# Altium PCB petroskey.PcbDoc (part 1 of 2)
Units mm, origin at the board's own origin, x right, y up, seen from the top; angles counter-clockwise.
Board outline 288 x 108 mm, 2 copper layers (Top Layer, Bottom Layer), stack 1.57 mm thick; 441 components, 333 nets, 1412 pads, 0 vias.
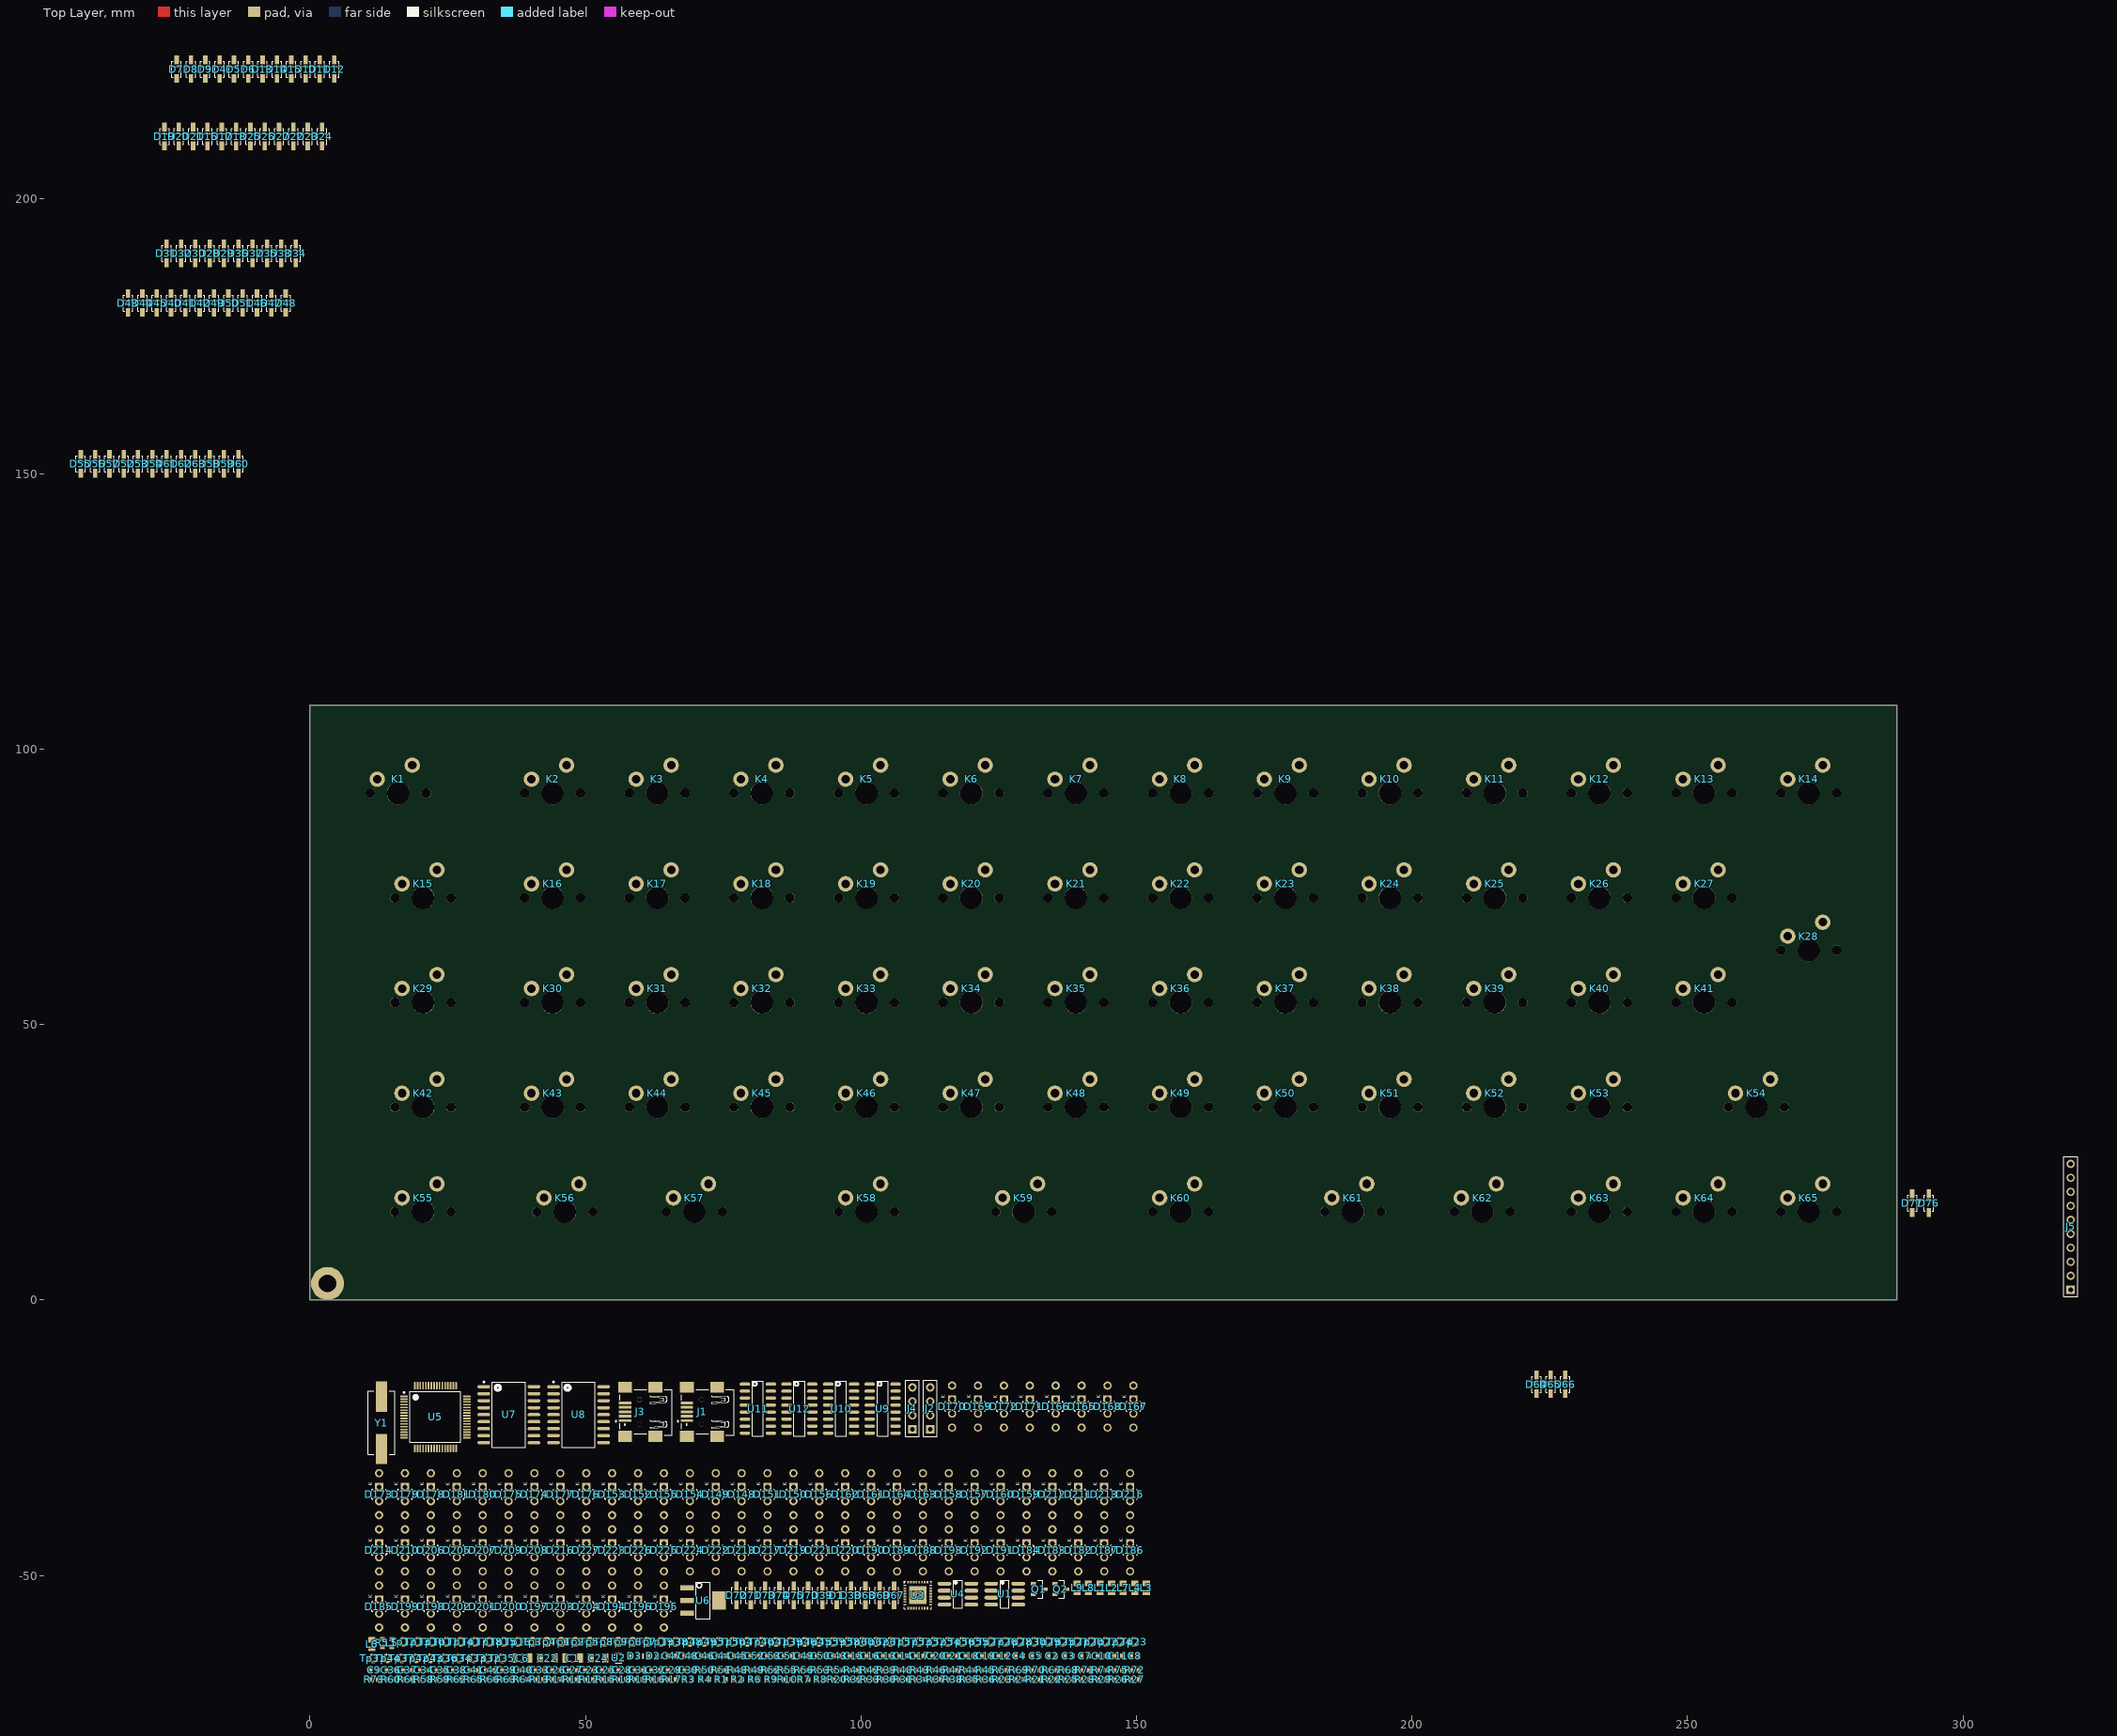
[diagram p0: Top Layer view]
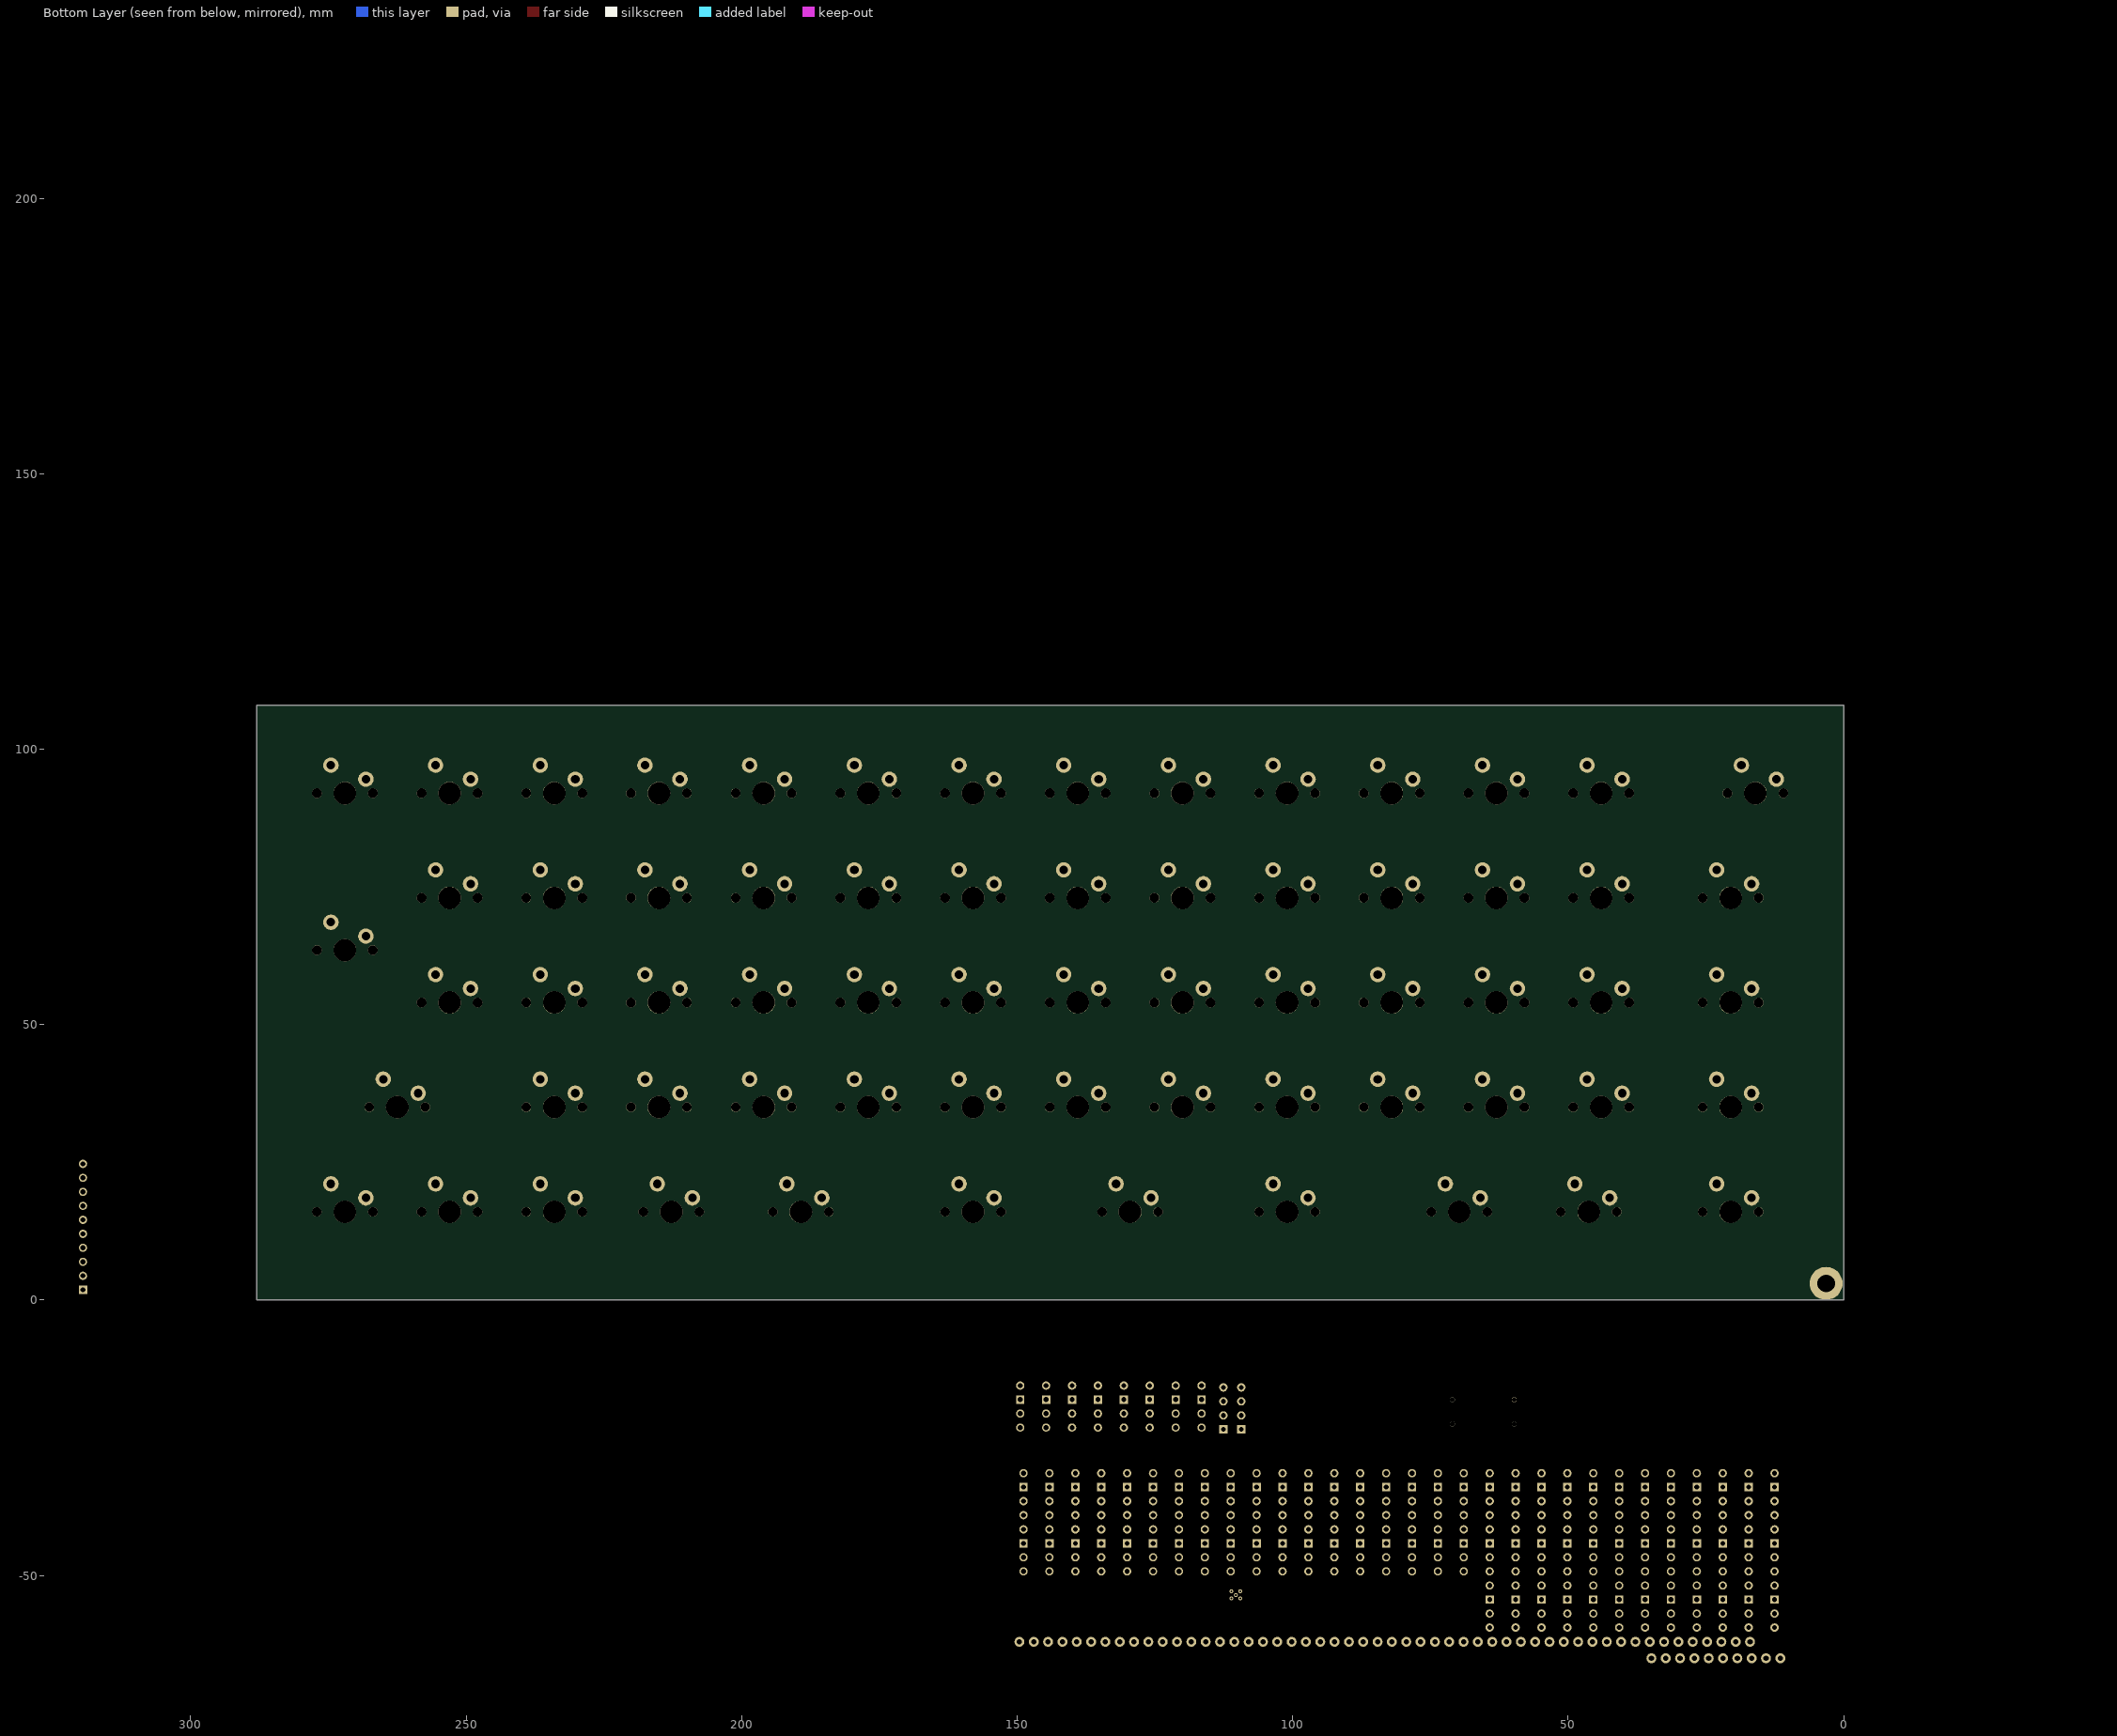
[diagram p1: Bottom Layer view, seen from below]

## Layer stack, top to bottom
Top Solder: solder mask 0.0102, Solder Resist, Dk 3.5
Top Layer: signal copper 0.035
Dielectric1: core 1.5, FR-4, Dk 4.2
Bottom Layer: signal copper 0.035
Bottom Solder: solder mask 0.0102, Solder Resist, Dk 3.5

## Board outline
0,0 0,108 288,108 288,0

## Design rules (kind name [scope] priority, off if disabled: settings)
Clearance [All] p1: gap=0.25
ComponentClearance [All] p1: gap=0.25 collisioncheckmode=3 verticalgap=0.25 showdistances=FALSE
DiffPairsRouting [All] p1: maxlimit=0.254 minlimit=0.254 mostfreqgap=0.254 toplayer_minwidth=0.381 toplayer_maxwidth=0.381 toplayer_prefwidth=0.381 bottomlayer_minwidth=0.381 bottomlayer_maxwidth=0.381 bottomlayer_prefwidth=0.381 maxuncoupledlength=12.7
HoleSize [All] p1: absolutevalues=TRUE maxlimit=10 minlimit=0.2 maxpercent=80.000 minpercent=20.000
HoleToHoleClearance [All] p1: gap=0.25 allowstackedmicrovias=TRUE
MinimumSolderMaskSliver [All] p1: minsoldermaskwidth=0.15
PlaneClearance [All] p1: clearance=0.5
PlaneConnect PlaneConnect_via [isvia] p1: planeconnectstyle=Direct reliefexpansion=0.508 reliefentries=4 reliefconductorwidth=0.254 reliefairgap=0.254
PlaneConnect [All] p2: planeconnectstyle=Relief reliefexpansion=0.6 reliefentries=4 reliefconductorwidth=0.35 reliefairgap=0.35
PolygonConnect PolygonConnect_via [isvia] p1: connectstyle=Direct reliefconductorwidth=0.254 reliefentries=4 polygonreliefangle="90 Angle" airgapwidth=0.254
PolygonConnect [All] p2: connectstyle=Relief reliefconductorwidth=0.35 reliefentries=4 polygonreliefangle="90 Angle" airgapwidth=0.6
RoutingCorners [All] p1: cornerstyle=45-Degree minsetback=2.5 maxsetback=2.5
RoutingVias [All] p1: holewidth=0.3 width=0.6 viastyle="Through Hole" minholewidth=0.2 minwidth=0.35 maxholewidth=0.5 maxwidth=1
SilkToSilkClearance [All] p1: silktosilkclearance=0.1
SilkToSolderMaskClearance [IsPad] p1: minsilkscreentomaskgap=0.15 clearancetoexposedcopper=TRUE
SolderMaskExpansion SolderMaskExpansion_via [isVia] p1: expansion=-10
SolderMaskExpansion [All] p2: expansion=0.05
Width [All] p1: maxlimit=5 minlimit=0.15 preferedwidth=0.25
20 further rules are at their usual default settings.

## Classes and differential pairs
net class usb_diff: USB_N USB_P
net class Power: +3.3V +5V VDD
differential pair USB: +USB_P -USB_N
differential pair FTDIUSB: +FTDIUSB_P -FTDIUSB_N

## Components (designator, comment, footprint, x,y, rotation, side; value= is the part's Value field where it differs from the comment)
C1 "4.7uF" 1206_[3216] 47.675,-65.004 r0 top
C2 "100nF" 0603_[1608] 134.679,-64.604 r0 top
C3 "10nF" 0603_[1608] 137.679,-64.604 r0 top
C4 "100nF" 0603_[1608] 128.678,-64.604 r0 top
C5 "100nF" 0603_[1608] 131.678,-64.604 r0 top
C6 "4.7uF" 1206_[3216] 38.475,-65.004 r0 top
C7 "10nF" 0603_[1608] 140.679,-64.604 r0 top
C8 "100nF" 0603_[1608] 149.679,-64.604 r0 top
C9 "100nF" 0603_[1608] 11.675,-67.204 r0 top
C10 "100nF" 0603_[1608] 143.679,-64.604 r0 top
C11 "27pF" 0603_[1608] 146.679,-64.604 r0 top
C12 "100nF" 0603_[1608] 125.678,-64.604 r0 top
C13 "27pF" 0603_[1608] 104.677,-64.604 r0 top
C14 "1uF" 0603_[1608] 107.677,-64.604 r0 top
C15 "2.2uF" 0603_[1608] 98.677,-64.604 r0 top
C16 "2.2uF" 0603_[1608] 101.677,-64.604 r0 top
C17 "100nF" 0603_[1608] 110.677,-64.604 r0 top
C18 "100nF" 0603_[1608] 119.678,-64.604 r0 top
C19 "100nF" 0603_[1608] 122.678,-64.604 r0 top
C20 "100nF" 0603_[1608] 113.678,-64.604 r0 top
C21 "4.7uF" 0603_[1608] 116.678,-64.604 r0 top
C22 "10uF" 1206_[3216] 43.075,-65.004 r0 top
C23 "100nF" 0603_[1608] 50.677,-67.204 r0 top
C24 "10uF" 1206_[3216] 52.275,-65.004 r0 top
C25 "100nF" 0603_[1608] 53.677,-67.204 r0 top
C26 "100nF" 0603_[1608] 44.677,-67.204 r0 top
C27 "100nF" 0603_[1608] 47.677,-67.204 r0 top
C28 "100nF" 0603_[1608] 56.677,-67.204 r0 top
C29 "100nF" 0603_[1608] 65.678,-67.204 r0 top
C30 "100nF" 0603_[1608] 68.678,-67.204 r0 top
C31 "100nF" 0603_[1608] 59.678,-67.204 r0 top
C32 "100nF" 0603_[1608] 62.678,-67.204 r0 top
C33 "100nF" 0603_[1608] 41.677,-67.204 r0 top
C34 "100nF" 0603_[1608] 20.675,-67.204 r0 top
C35 "100nF" 0603_[1608] 23.676,-67.204 r0 top
C36 "100nF" 0603_[1608] 14.675,-67.204 r0 top
C37 "100nF" 0603_[1608] 17.675,-67.204 r0 top
C38 "100nF" 0603_[1608] 26.676,-67.204 r0 top
C39 "100nF" 0603_[1608] 35.676,-67.204 r0 top
C40 "100nF" 0603_[1608] 38.676,-67.204 r0 top
C41 "100nF" 0603_[1608] 29.676,-67.204 r0 top
C42 "100nF" 0603_[1608] 32.676,-67.204 r0 top
C43 "100nF" 0603_[1608] 95.677,-64.604 r0 top
C44 "100nF" 0603_[1608] 74.675,-64.604 r0 top
C45 "100nF" 0603_[1608] 77.676,-64.604 r0 top
C46 "100nF" 0603_[1608] 71.675,-64.604 r0 top
C47 "100nF" 0603_[1608] 65.675,-64.604 r0 top
C48 "100nF" 0603_[1608] 68.675,-64.604 r0 top
C49 "100nF" 0603_[1608] 89.676,-64.604 r0 top
C50 "100nF" 0603_[1608] 92.676,-64.604 r0 top
C51 "100nF" 0603_[1608] 86.676,-64.604 r0 top
C52 "100nF" 0603_[1608] 80.676,-64.604 r0 top
C53 "100nF" 0603_[1608] 83.676,-64.604 r0 top
D1 "MBR120VLSFT1G" SOD-123 95.575,-53.604 r90 top
D2 "+5V" 0603_[1608]_K2-A1_LED 62.275,-64.654 r0 top
D3 "+3.3V" 0603_[1608]_K2-A1_LED 58.875,-64.654 r0 top
D4 "diode" SOD-123 -16.425,223.446 r90 top
D5 "diode" SOD-123 -13.825,223.446 r90 top
D6 "diode" SOD-123 -11.225,223.446 r90 top
D7 "diode" SOD-123 -24.225,223.446 r90 top
D8 "diode" SOD-123 -21.625,223.446 r90 top
D9 "diode" SOD-123 -19.025,223.446 r90 top
D10 "diode" SOD-123 -0.825,223.446 r90 top
D11 "diode" SOD-123 1.775,223.446 r90 top
D12 "diode" SOD-123 4.375,223.446 r90 top
D13 "diode" SOD-123 -8.625,223.446 r90 top
D14 "diode" SOD-123 -6.025,223.446 r90 top
D15 "diode" SOD-123 -3.425,223.446 r90 top
D16 "diode" SOD-123 -18.625,211.25 r90 top
D17 "diode" SOD-123 -16.025,211.25 r90 top
D18 "diode" SOD-123 -13.425,211.25 r90 top
D19 "diode" SOD-123 -26.425,211.25 r90 top
D20 "diode" SOD-123 -23.825,211.25 r90 top
D21 "diode" SOD-123 -21.225,211.25 r90 top
D22 "diode" SOD-123 -3.025,211.25 r90 top
D23 "diode" SOD-123 -0.425,211.25 r90 top
D24 "diode" SOD-123 2.175,211.25 r90 top
D25 "diode" SOD-123 -10.825,211.25 r90 top
D26 "diode" SOD-123 -8.225,211.25 r90 top
D27 "diode" SOD-123 -5.625,211.25 r90 top
D28 "diode" SOD-123 -18.225,190 r90 top
D29 "diode" SOD-123 -15.625,190 r90 top
D30 "diode" SOD-123 -20.825,190 r90 top
D31 "diode" SOD-123 -26.025,190 r90 top
D32 "diode" SOD-123 -23.425,190 r90 top
D33 "diode" SOD-123 -5.225,190 r90 top
D34 "diode" SOD-123 -2.625,190 r90 top
D35 "diode" SOD-123 -7.825,190 r90 top
D36 "diode" SOD-123 -13.025,190 r90 top
D37 "diode" SOD-123 -10.425,190 r90 top
D38 "diode" SOD-123 98.175,-53.604 r90 top
D39 "diode" SOD-123 92.975,-53.604 r90 top
D40 "diode" SOD-123 -25.225,180.996 r90 top
D41 "diode" SOD-123 -22.625,180.996 r90 top
D42 "diode" SOD-123 -20.025,180.996 r90 top
D43 "diode" SOD-123 -33.025,180.996 r90 top
D44 "diode" SOD-123 -30.425,180.996 r90 top
D45 "diode" SOD-123 -27.825,180.996 r90 top
D46 "diode" SOD-123 -9.625,180.996 r90 top
D47 "diode" SOD-123 -7.025,180.996 r90 top
D48 "diode" SOD-123 -4.425,180.996 r90 top
D49 "diode" SOD-123 -17.425,180.996 r90 top
D50 "diode" SOD-123 -14.825,180.996 r90 top
D51 "diode" SOD-123 -12.225,180.996 r90 top
D52 "diode" SOD-123 -33.825,151.8 r90 top
D53 "diode" SOD-123 -31.225,151.8 r90 top
D54 "diode" SOD-123 -28.625,151.8 r90 top
D55 "diode" SOD-123 -41.625,151.8 r90 top
D56 "diode" SOD-123 -39.025,151.8 r90 top
D57 "diode" SOD-123 -36.425,151.8 r90 top
D58 "diode" SOD-123 -18.225,151.8 r90 top
D59 "diode" SOD-123 -15.625,151.8 r90 top
D60 "diode" SOD-123 -13.025,151.8 r90 top
D61 "diode" SOD-123 -26.025,151.8 r90 top
D62 "diode" SOD-123 -23.425,151.8 r90 top
D63 "diode" SOD-123 -20.825,151.8 r90 top
D64 "diode" SOD-123 222.575,-15.304 r90 top
D65 "diode" SOD-123 225.175,-15.304 r90 top
D66 "diode" SOD-123 227.775,-15.304 r90 top
D67 "diode" SOD-123 105.975,-53.604 r90 top
D68 "diode" SOD-123 100.775,-53.604 r90 top
D69 "diode" SOD-123 103.375,-53.604 r90 top
D70 "diode" SOD-123 90.375,-53.604 r90 top
D71 "diode" SOD-123 79.975,-53.604 r90 top
D72 "diode" SOD-123 77.375,-53.604 r90 top
D73 "diode" SOD-123 82.575,-53.604 r90 top
D74 "diode" SOD-123 85.175,-53.604 r90 top
D75 "diode" SOD-123 87.775,-53.604 r90 top
D76 "diode" SOD-123 293.775,17.6 r90 top
D77 "diode" SOD-123 290.775,17.6 r90 top
D148 "RBG" R3_RGB_LED_THD 78.325,-35.254 r90 top
D149 "RBG" R3_RGB_LED_THD 73.625,-35.254 r90 top
D150 "RBG" R3_RGB_LED_THD 87.725,-35.254 r90 top
D151 "RBG" R3_RGB_LED_THD 83.025,-35.254 r90 top
D152 "RBG" R3_RGB_LED_THD 59.525,-35.254 r90 top
D153 "RBG" R3_RGB_LED_THD 54.825,-35.254 r90 top
D154 "RBG" R3_RGB_LED_THD 68.925,-35.254 r90 top
D155 "RBG" R3_RGB_LED_THD 64.225,-35.254 r90 top
D156 "RBG" R3_RGB_LED_THD 92.425,-35.254 r90 top
D157 "RBG" R3_RGB_LED_THD 120.625,-35.254 r90 top
D158 "RBG" R3_RGB_LED_THD 115.925,-35.254 r90 top
D159 "RBG" R3_RGB_LED_THD 130.025,-35.254 r90 top
D160 "RBG" R3_RGB_LED_THD 125.325,-35.254 r90 top
D161 "RBG" R3_RGB_LED_THD 101.825,-35.254 r90 top
D162 "RBG" R3_RGB_LED_THD 97.125,-35.254 r90 top
D163 "RBG" R3_RGB_LED_THD 111.225,-35.254 r90 top
D164 "RBG" R3_RGB_LED_THD 106.525,-35.254 r90 top
D165 "RBG" R3_RGB_LED_THD 140.025,-19.354 r90 top
D166 "RBG" R3_RGB_LED_THD 135.325,-19.354 r90 top
D167 "RBG" R3_RGB_LED_THD 149.425,-19.354 r90 top
D168 "RBG" R3_RGB_LED_THD 144.725,-19.354 r90 top
D169 "RBG" R3_RGB_LED_THD 121.225,-19.354 r90 top
D170 "RBG" R3_RGB_LED_THD 116.525,-19.354 r90 top
D171 "RBG" R3_RGB_LED_THD 130.625,-19.354 r90 top
D172 "RBG" R3_RGB_LED_THD 125.925,-19.354 r90 top
D173 "RBG" R3_RGB_LED_THD 12.525,-35.254 r90 top
D174 "RBG" R3_RGB_LED_THD 40.725,-35.254 r90 top
D175 "RBG" R3_RGB_LED_THD 36.025,-35.254 r90 top
D176 "RBG" R3_RGB_LED_THD 50.125,-35.254 r90 top
D177 "RBG" R3_RGB_LED_THD 45.425,-35.254 r90 top
D178 "RBG" R3_RGB_LED_THD 21.925,-35.254 r90 top
D179 "RBG" R3_RGB_LED_THD 17.225,-35.254 r90 top
D180 "RBG" R3_RGB_LED_THD 31.325,-35.254 r90 top
D181 "RBG" R3_RGB_LED_THD 26.625,-35.254 r90 top
D182 "RBG" R3_RGB_LED_THD 139.425,-45.454 r90 top
D183 "RBG" R3_RGB_LED_THD 134.725,-45.454 r90 top
D184 "RBG" R3_RGB_LED_THD 130.025,-45.454 r90 top
D185 "RBG" R3_RGB_LED_THD 12.525,-55.654 r90 top
D186 "RBG" R3_RGB_LED_THD 148.825,-45.454 r90 top
D187 "RBG" R3_RGB_LED_THD 144.125,-45.454 r90 top
D188 "RBG" R3_RGB_LED_THD 111.225,-45.454 r90 top
D189 "RBG" R3_RGB_LED_THD 106.525,-45.454 r90 top
D190 "RBG" R3_RGB_LED_THD 101.825,-45.454 r90 top
D191 "RBG" R3_RGB_LED_THD 125.325,-45.454 r90 top
D192 "RBG" R3_RGB_LED_THD 120.625,-45.454 r90 top
D193 "RBG" R3_RGB_LED_THD 115.925,-45.454 r90 top
D194 "RBG" R3_RGB_LED_THD 54.825,-55.654 r90 top
D195 "RBG" R3_RGB_LED_THD 64.225,-55.654 r90 top
D196 "RBG" R3_RGB_LED_THD 59.525,-55.654 r90 top
D197 "RBG" R3_RGB_LED_THD 40.725,-55.654 r90 top
D198 "RBG" R3_RGB_LED_THD 21.925,-55.654 r90 top
D199 "RBG" R3_RGB_LED_THD 17.225,-55.654 r90 top
D200 "RBG" R3_RGB_LED_THD 36.025,-55.654 r90 top
D201 "RBG" R3_RGB_LED_THD 31.325,-55.654 r90 top
D202 "RBG" R3_RGB_LED_THD 26.625,-55.654 r90 top
D203 "RBG" R3_RGB_LED_THD 45.425,-55.654 r90 top
D204 "RBG" R3_RGB_LED_THD 50.125,-55.654 r90 top
D205 "RBG" R3_RGB_LED_THD 26.625,-45.454 r90 top
D206 "RBG" R3_RGB_LED_THD 21.925,-45.454 r90 top
D207 "RBG" R3_RGB_LED_THD 31.325,-45.454 r90 top
D208 "RBG" R3_RGB_LED_THD 40.725,-45.454 r90 top
D209 "RBG" R3_RGB_LED_THD 36.025,-45.454 r90 top
D210 "RBG" R3_RGB_LED_THD 17.225,-45.454 r90 top
D211 "RBG" R3_RGB_LED_THD 139.425,-35.254 r90 top
D212 "RBG" R3_RGB_LED_THD 134.725,-35.254 r90 top
D213 "RBG" R3_RGB_LED_THD 144.125,-35.254 r90 top
D214 "RBG" R3_RGB_LED_THD 12.525,-45.454 r90 top
D215 "RBG" R3_RGB_LED_THD 148.825,-35.254 r90 top
D216 "RBG" R3_RGB_LED_THD 45.425,-45.454 r90 top
D217 "RBG" R3_RGB_LED_THD 83.025,-45.454 r90 top
D218 "RBG" R3_RGB_LED_THD 78.325,-45.454 r90 top
D219 "RBG" R3_RGB_LED_THD 87.725,-45.454 r90 top
D220 "RBG" R3_RGB_LED_THD 97.125,-45.454 r90 top
D221 "RBG" R3_RGB_LED_THD 92.425,-45.454 r90 top
D222 "RBG" R3_RGB_LED_THD 73.625,-45.454 r90 top
D223 "RBG" R3_RGB_LED_THD 54.825,-45.454 r90 top
D224 "RBG" R3_RGB_LED_THD 68.925,-45.454 r90 top
D225 "RBG" R3_RGB_LED_THD 64.225,-45.454 r90 top
D226 "RBG" R3_RGB_LED_THD 59.525,-45.454 r90 top
D227 "RBG" R3_RGB_LED_THD 50.125,-45.454 r90 top
J1 "Mini USB Type B" usb_typeB_mini_smd 71.145,-20.304 r90 top
J2 "SWD" HEADER_1X4_2.54MM_THD 112.555,-19.684 r90 top
J3 "Mini USB Type B" usb_typeB_mini_smd 59.925,-20.304 r90 top
J4 "PCB Conn" HEADER_1X4_2.54MM_THD 109.315,-19.684 r90 top
J5 "Display" HDR1X10 319.524,1.849 r90 top
K1 "KEY0" TACTILE_SWITCH_GATERON_PCB 16,92 r0 top locked
K2 "KEY0" TACTILE_SWITCH_GATERON_PCB 44,92 r0 top locked
K3 "KEY0" TACTILE_SWITCH_GATERON_PCB 63,92 r0 top locked
K4 "KEY0" TACTILE_SWITCH_GATERON_PCB 82,92 r0 top locked
K5 "KEY0" TACTILE_SWITCH_GATERON_PCB 101,92 r0 top locked
K6 "KEY0" TACTILE_SWITCH_GATERON_PCB 120,92 r0 top locked
K7 "KEY0" TACTILE_SWITCH_GATERON_PCB 139,92 r0 top locked
K8 "KEY0" TACTILE_SWITCH_GATERON_PCB 158,92 r0 top locked
K9 "KEY0" TACTILE_SWITCH_GATERON_PCB 177,92 r0 top locked
K10 "KEY0" TACTILE_SWITCH_GATERON_PCB 196,92 r0 top locked
K11 "KEY0" TACTILE_SWITCH_GATERON_PCB 215,92 r0 top locked
K12 "KEY0" TACTILE_SWITCH_GATERON_PCB 234,92 r0 top locked
K13 "KEY0" TACTILE_SWITCH_GATERON_PCB 253,92 r0 top locked
K14 "KEY0" TACTILE_SWITCH_GATERON_PCB 272,92 r0 top locked
K15 "KEY0" TACTILE_SWITCH_GATERON_PCB 20.5,73 r0 top locked
K16 "KEY0" TACTILE_SWITCH_GATERON_PCB 44,73 r0 top locked
K17 "KEY0" TACTILE_SWITCH_GATERON_PCB 63,73 r0 top locked
K18 "KEY0" TACTILE_SWITCH_GATERON_PCB 82,73 r0 top locked
K19 "KEY0" TACTILE_SWITCH_GATERON_PCB 101,73 r0 top locked
K20 "KEY0" TACTILE_SWITCH_GATERON_PCB 120,73 r0 top locked
K21 "KEY0" TACTILE_SWITCH_GATERON_PCB 139,73 r0 top locked
K22 "KEY0" TACTILE_SWITCH_GATERON_PCB 158,73 r0 top locked
K23 "KEY0" TACTILE_SWITCH_GATERON_PCB 177,73 r0 top locked
K24 "KEY0" TACTILE_SWITCH_GATERON_PCB 196,73 r0 top locked
K25 "KEY0" TACTILE_SWITCH_GATERON_PCB 215,73 r0 top locked
K26 "KEY0" TACTILE_SWITCH_GATERON_PCB 234,73 r0 top locked
K27 "KEY0" TACTILE_SWITCH_GATERON_PCB 253,73 r0 top locked
K28 "KEY0" TACTILE_SWITCH_GATERON_PCB 272,63.5 r0 top locked
K29 "KEY0" TACTILE_SWITCH_GATERON_PCB 20.5,54 r0 top locked
K30 "KEY0" TACTILE_SWITCH_GATERON_PCB 44,54 r0 top locked
K31 "KEY0" TACTILE_SWITCH_GATERON_PCB 63,54 r0 top locked
K32 "KEY0" TACTILE_SWITCH_GATERON_PCB 82,54 r0 top locked
K33 "KEY0" TACTILE_SWITCH_GATERON_PCB 101,54 r0 top locked
K34 "KEY0" TACTILE_SWITCH_GATERON_PCB 120,54 r0 top locked
K35 "KEY0" TACTILE_SWITCH_GATERON_PCB 139,54 r0 top locked
K36 "KEY0" TACTILE_SWITCH_GATERON_PCB 158,54 r0 top locked
K37 "KEY0" TACTILE_SWITCH_GATERON_PCB 177,54 r0 top locked
K38 "KEY0" TACTILE_SWITCH_GATERON_PCB 196,54 r0 top locked
K39 "KEY0" TACTILE_SWITCH_GATERON_PCB 215,54 r0 top locked
K40 "KEY0" TACTILE_SWITCH_GATERON_PCB 234,54 r0 top locked
K41 "KEY0" TACTILE_SWITCH_GATERON_PCB 253,54 r0 top locked
K42 "KEY0" TACTILE_SWITCH_GATERON_PCB 20.5,35 r0 top locked
K43 "KEY0" TACTILE_SWITCH_GATERON_PCB 44,35 r0 top locked
K44 "KEY0" TACTILE_SWITCH_GATERON_PCB 63,35 r0 top locked
K45 "KEY0" TACTILE_SWITCH_GATERON_PCB 82,35 r0 top locked
K46 "KEY0" TACTILE_SWITCH_GATERON_PCB 101,35 r0 top locked
K47 "KEY0" TACTILE_SWITCH_GATERON_PCB 120,35 r0 top locked
K48 "KEY0" TACTILE_SWITCH_GATERON_PCB 139,35 r0 top locked
K49 "KEY0" TACTILE_SWITCH_GATERON_PCB 158,35 r0 top locked
K50 "KEY0" TACTILE_SWITCH_GATERON_PCB 177,35 r0 top locked
K51 "KEY0" TACTILE_SWITCH_GATERON_PCB 196,35 r0 top locked
K52 "KEY0" TACTILE_SWITCH_GATERON_PCB 215,35 r0 top locked
K53 "KEY0" TACTILE_SWITCH_GATERON_PCB 234,35 r0 top locked
K54 "KEY0" TACTILE_SWITCH_GATERON_PCB 262.5,35 r0 top locked
K55 "KEY0" TACTILE_SWITCH_GATERON_PCB 20.5,16 r0 top locked
K56 "KEY0" TACTILE_SWITCH_GATERON_PCB 46.25,16 r0 top locked
K57 "KEY0" TACTILE_SWITCH_GATERON_PCB 69.75,16 r0 top locked
K58 "KEY0" TACTILE_SWITCH_GATERON_PCB 101,16 r0 top locked
K59 "KEY0" TACTILE_SWITCH_GATERON_PCB 129.5,16 r0 top locked
K60 "KEY0" TACTILE_SWITCH_GATERON_PCB 158,16 r0 top locked
K61 "KEY0" TACTILE_SWITCH_GATERON_PCB 189.25,16 r0 top locked
K62 "KEY0" TACTILE_SWITCH_GATERON_PCB 212.75,16 r0 top locked
K63 "KEY0" TACTILE_SWITCH_GATERON_PCB 234,16 r0 top locked
K64 "KEY0" tactile_switch_gateron_pcb 253,16 r0 top locked
K65 "KEY0" tactile_switch_gateron_pcb 272,16 r0 top locked
L1 "220 ohm @ 100MHz" 0805_[2012] 143.375,-52.254 r90 top
L2 "220 ohm @ 100MHz" 0805_[2012] 145.475,-52.254 r90 top
L3 "220 ohm @ 100MHz" 0805_[2012] 151.775,-52.254 r90 top
L4 "220 ohm @ 100MHz" 0805_[2012] 149.675,-52.254 r90 top
L5 "180R @ 100Mhz" 0603_[1608] 14.825,-62.254 r90 top
L6 "220 ohm @ 100MHz" 0805_[2012] 11.225,-62.454 r90 top
L7 "220 ohm @ 100MHz" 0805_[2012] 147.575,-52.254 r90 top
L8 "220 ohm @ 100MHz" 0805_[2012] 141.275,-52.254 r90 top
L9 "220 ohm @ 100MHz" 0805_[2012] 139.175,-52.254 r90 top
Q1 "BC817" SOT-23 132.312,-52.504 r0 top
Q2 "BC817" SOT-23 136.212,-52.504 r0 top
R1 "10k" 0603_[1608] 74.678,-68.904 r0 top
R2 "47k" 0603_[1608] 77.678,-68.904 r0 top
R3 "10k" 0603_[1608] 68.678,-68.904 r0 top
R4 "10k" 0603_[1608] 71.678,-68.904 r0 top
R5 "1k" 0603_[1608] 13.125,-62.254 r90 top
R6 "33k" 0603_[1608] 80.679,-68.904 r0 top
R7 "1k5" 0603_[1608] 89.679,-68.904 r0 top
R8 "100K" 0603_[1608] 92.679,-68.904 r0 top
R9 "33R" 0603_[1608] 83.679,-68.904 r0 top
R10 "33R" 0603_[1608] 86.679,-68.904 r0 top
R11 "33R" 0603_[1608] 47.677,-68.904 r0 top
R12 "33R" 0603_[1608] 50.677,-68.904 r0 top
R13 "33R" 0603_[1608] 41.677,-68.904 r0 top
R14 "33R" 0603_[1608] 44.677,-68.904 r0 top
R15 "33R" 0603_[1608] 53.677,-68.904 r0 top
R16 "33R" 0603_[1608] 62.678,-68.904 r0 top
R17 "33R" 0603_[1608] 65.678,-68.904 r0 top
R18 "33R" 0603_[1608] 56.677,-68.904 r0 top
R19 "33R" 0603_[1608] 59.678,-68.904 r0 top
R20 "33R" 0603_[1608] 95.679,-68.904 r0 top
R21 "33R" 0603_[1608] 131.681,-68.904 r0 top
R22 "1M" 0603_[1608] 134.682,-68.904 r0 top
R23 "10K" 0603_[1608] 125.681,-68.904 r0 top
R24 "10K" 0603_[1608] 128.681,-68.904 r0 top
R25 "33R" 0603_[1608] 137.682,-68.904 r0 top
R26 "10K" 0603_[1608] 146.682,-68.904 r0 top
R27 "33R" 0603_[1608] 149.682,-68.904 r0 top
R28 "10K" 0603_[1608] 140.682,-68.904 r0 top
R29 "10K" 0603_[1608] 143.682,-68.904 r0 top
R30 "33R" 0603_[1608] 104.68,-68.904 r0 top
R31 "33R" 0603_[1608] 107.68,-68.904 r0 top
R32 "33R" 0603_[1608] 98.68,-68.904 r0 top
R33 "33R" 0603_[1608] 101.68,-68.904 r0 top
R34 "680R" 0603_[1608] 110.68,-68.904 r0 top
R35 "180R" 0603_[1608] 119.681,-68.904 r0 top
R36 "33R" 0603_[1608] 122.681,-68.904 r0 top
R37 "33R" 0603_[1608] 113.68,-68.904 r0 top
R38 "33R" 0603_[1608] 116.681,-68.904 r0 top
R39 "33R" 0603_[1608] 104.68,-67.204 r0 top
R40 "33R" 0603_[1608] 107.68,-67.204 r0 top
R41 "33R" 0603_[1608] 98.68,-67.204 r0 top
R42 "33R" 0603_[1608] 101.68,-67.204 r0 top
R43 "33R" 0603_[1608] 110.68,-67.204 r0 top
R44 "33R" 0603_[1608] 119.681,-67.204 r0 top
R45 "33R" 0603_[1608] 122.681,-67.204 r0 top
R46 "33R" 0603_[1608] 113.68,-67.204 r0 top
R47 "33R" 0603_[1608] 116.681,-67.204 r0 top
R48 "33R" 0603_[1608] 77.678,-67.204 r0 top
R49 "33R" 0603_[1608] 80.679,-67.204 r0 top
R50 "33R" 0603_[1608] 71.678,-67.204 r0 top
R51 "33R" 0603_[1608] 74.678,-67.204 r0 top
R52 "33R" 0603_[1608] 83.679,-67.204 r0 top
R53 "33R" 0603_[1608] 92.679,-67.204 r0 top
R54 "33R" 0603_[1608] 95.679,-67.204 r0 top
R55 "33R" 0603_[1608] 86.679,-67.204 r0 top
R56 "33R" 0603_[1608] 89.679,-67.204 r0 top
R57 "33R" 0603_[1608] 125.681,-67.204 r0 top
R58 "33R" 0603_[1608] 20.675,-68.904 r0 top
R59 "33R" 0603_[1608] 23.676,-68.904 r0 top
R60 "33R" 0603_[1608] 14.675,-68.904 r0 top
R61 "33R" 0603_[1608] 17.675,-68.904 r0 top
R62 "33R" 0603_[1608] 26.676,-68.904 r0 top
R63 "33R" 0603_[1608] 35.676,-68.904 r0 top
R64 "33R" 0603_[1608] 38.676,-68.904 r0 top
R65 "33R" 0603_[1608] 29.676,-68.904 r0 top
R66 "33R" 0603_[1608] 32.676,-68.904 r0 top
R67 "33R" 0603_[1608] 134.682,-67.204 r0 top
R68 "33R" 0603_[1608] 137.682,-67.204 r0 top
R69 "33R" 0603_[1608] 128.681,-67.204 r0 top
R70 "33R" 0603_[1608] 131.681,-67.204 r0 top
R71 "33R" 0603_[1608] 140.682,-67.204 r0 top
R72 "33R" 0603_[1608] 149.682,-67.204 r0 top
R73 "33R" 0603_[1608] 11.675,-68.904 r0 top
R74 "33R" 0603_[1608] 143.682,-67.204 r0 top
R75 "2K2" 0603_[1608] 146.682,-67.204 r0 top
Tp1 "PA2-C0" TEST_POINT_THD_D1.8MM 45.575,-62.054 r0 top
Tp2 "PA3-R0" TEST_POINT_THD_D1.8MM 48.175,-62.054 r0 top
Tp3 "+3.3V" TEST_POINT_THD_D1.8MM 40.375,-62.054 r0 top
Tp4 "+5V" TEST_POINT_THD_D1.8MM 42.975,-62.054 r0 top
Tp5 "GND" TEST_POINT_THD_D1.8MM 50.775,-62.054 r0 top
Tp6 "GND" TEST_POINT_THD_D1.8MM 58.575,-62.054 r0 top
Tp7 "Vusb" TEST_POINT_THD_D1.8MM 61.175,-62.054 r0 top
Tp8 "PB0" TEST_POINT_THD_D1.8MM 53.375,-62.054 r0 top
Tp9 "PB0" TEST_POINT_THD_D1.8MM 55.975,-62.054 r0 top
Tp10 "PB0" TEST_POINT_THD_D1.8MM 22.175,-62.054 r0 top
Tp11 "PB0" TEST_POINT_THD_D1.8MM 24.775,-62.054 r0 top
Tp12 "PB0" TEST_POINT_THD_D1.8MM 16.975,-62.054 r0 top
Tp13 "PB0" TEST_POINT_THD_D1.8MM 19.575,-62.054 r0 top
Tp14 "PB0" TEST_POINT_THD_D1.8MM 27.375,-62.054 r0 top
Tp15 "PB0" TEST_POINT_THD_D1.8MM 35.175,-62.054 r0 top
Tp16 "PB0" TEST_POINT_THD_D1.8MM 37.775,-62.054 r0 top
Tp17 "PB0" TEST_POINT_THD_D1.8MM 29.975,-62.054 r0 top
Tp18 "PB0" TEST_POINT_THD_D1.8MM 32.575,-62.054 r0 top
Tp19 "PB0" TEST_POINT_THD_D1.8MM 63.775,-62.054 r0 top
Tp20 "PB0" TEST_POINT_THD_D1.8MM 141.775,-62.054 r0 top
Tp21 "PB0" TEST_POINT_THD_D1.8MM 139.175,-62.054 r0 top
Tp22 "PB0" TEST_POINT_THD_D1.8MM 144.375,-62.054 r0 top
Tp23 "PB0" TEST_POINT_THD_D1.8MM 149.575,-62.054 r0 top
Tp24 "PB0" TEST_POINT_THD_D1.8MM 146.975,-62.054 r0 top
Tp25 "PB0" TEST_POINT_THD_D1.8MM 136.575,-62.054 r0 top
Tp26 "PB0" TEST_POINT_THD_D1.8MM 126.175,-62.054 r0 top
Tp27 "PB0" TEST_POINT_THD_D1.8MM 123.575,-62.054 r0 top
Tp28 "PB0" TEST_POINT_THD_D1.8MM 128.775,-62.054 r0 top
Tp29 "PB0" TEST_POINT_THD_D1.8MM 133.975,-62.054 r0 top
Tp30 "PB0" TEST_POINT_THD_D1.8MM 131.375,-62.054 r0 top
Tp31 "PB0" TEST_POINT_THD_D1.8MM 11.475,-65.054 r0 top
Tp32 "PA3-R0" TEST_POINT_THD_D1.8MM 32.275,-65.054 r0 top
Tp33 "PA3-R0" TEST_POINT_THD_D1.8MM 29.675,-65.054 r0 top
Tp34 "PA3-R0" TEST_POINT_THD_D1.8MM 27.075,-65.054 r0 top
Tp35 "PA3-R0" TEST_POINT_THD_D1.8MM 34.875,-65.054 r0 top
Tp36 "PA3-R0" TEST_POINT_THD_D1.8MM 24.475,-65.054 r0 top
Tp37 "PA3-R0" TEST_POINT_THD_D1.8MM 16.675,-65.054 r0 top
Tp38 "PA3-R0" TEST_POINT_THD_D1.8MM 66.375,-62.054 r0 top
Tp39 "PA3-R0" TEST_POINT_THD_D1.8MM 87.175,-62.054 r0 top
Tp40 "PA3-R0" TEST_POINT_THD_D1.8MM 81.975,-62.054 r0 top
Tp41 "PA3-R0" TEST_POINT_THD_D1.8MM 84.575,-62.054 r0 top
Tp42 "PA3-R0" TEST_POINT_THD_D1.8MM 19.275,-65.054 r0 top
Tp43 "PA3-R0" TEST_POINT_THD_D1.8MM 21.875,-65.054 r0 top
Tp44 "PA3-R0" TEST_POINT_THD_D1.8MM 14.075,-65.054 r0 top
Tp45 "PA3-R0" TEST_POINT_THD_D1.8MM 92.375,-62.054 r0 top
Tp46 "PA3-R0" TEST_POINT_THD_D1.8MM 89.775,-62.054 r0 top
Tp47 "PA3-R0" TEST_POINT_THD_D1.8MM 79.375,-62.054 r0 top
Tp48 "PA3-R0" TEST_POINT_THD_D1.8MM 68.975,-62.054 r0 top
Tp49 "PA3-R0" TEST_POINT_THD_D1.8MM 71.575,-62.054 r0 top
Tp50 "PA3-R0" TEST_POINT_THD_D1.8MM 76.775,-62.054 r0 top
Tp51 "PA3-R0" TEST_POINT_THD_D1.8MM 74.175,-62.054 r0 top
Tp52 "PA3-R0" TEST_POINT_THD_D1.8MM 113.175,-62.054 r0 top
Tp53 "PA3-R0" TEST_POINT_THD_D1.8MM 110.575,-62.054 r0 top
Tp54 "PA3-R0" TEST_POINT_THD_D1.8MM 115.775,-62.054 r0 top
Tp55 "PA3-R0" TEST_POINT_THD_D1.8MM 120.975,-62.054 r0 top
Tp56 "PA3-R0" TEST_POINT_THD_D1.8MM 118.375,-62.054 r0 top
Tp57 "PA3-R0" TEST_POINT_THD_D1.8MM 107.975,-62.054 r0 top
Tp58 "PA3-R0" TEST_POINT_THD_D1.8MM 97.575,-62.054 r0 top
Tp59 "PA3-R0" TEST_POINT_THD_D1.8MM 94.975,-62.054 r0 top
Tp60 "PA3-R0" TEST_POINT_THD_D1.8MM 100.175,-62.054 r0 top
Tp61 "PA3-R0" TEST_POINT_THD_D1.8MM 105.375,-62.054 r0 top
Tp62 "PA3-R0" TEST_POINT_THD_D1.8MM 102.775,-62.054 r0 top
U1 "LM75A" SOIC8 126.075,-53.404 r0 top
U2 "TVS Array (WE 82400152)" SOT-563 55.981,-64.968 r90 top
U3 "FT232RQ" QFN-32 110.3,-53.579 r0 top
U4 "24C128" SOIC8 117.575,-53.404 r0 top
U5 "STM32F103RB" TSQFP50P1200X1200X160-64N 22.755,-21.254 r0 top
U6 "LM1117xxx-3.3" SOT-223 71.325,-54.554 r0 top
U7 "ULN2803" SOIC18 36.08,-20.829 r0 top
U8 "ULN2803" SOIC18 48.73,-20.829 r0 top
U9 "MC74HC595AD" SOIC16 103.92,-19.729 r0 top
U10 "MC74HC595AD" SOIC16 96.37,-19.729 r0 top
U11 "MC74HC595AD" SOIC16 81.27,-19.729 r0 top
U12 "MC74HC595AD" SOIC16 88.82,-19.729 r0 top
Y1 "8MHz" CRYSTAL_HC49UP 12.965,-22.304 r90 top

## Footprints (in the part's own frame and the unit in brackets; to place one, negate y for a bottom-side part, rotate by r counter-clockwise, add the part's x,y. Pads: shape width x height; smd on the part's side, far side on the other; paste and mask are expansions set on the pad)
0603_[1608] [mm] "Chip Capacitor, Body 1.6x0.8mm, IPC High Density"
  rect 0.8x0.9 smd: 1(-0.7,0) 2(0.7,0)
  body extent -0.75,-0.4 0.75,0.4, height 0.67
0603_[1608]_K2-A1_LED [mm] "SMD led 0603 size"
  rect 0.8x0.9 smd: 1(-0.7,0) 2(0.7,0)
  silkscreen extent 1.5,-0.5 1.5,0.5, body extent -0.8,-0.4 0.8,0.4, height 0.7
0805_[2012] [mm] "Chip Resistor, Body 2.0x1.2mm, IPC High Density"
  rect 1x1.3 smd: 1(-0.8,0) 2(0.8,0)
  body extent -1,-0.6 1,0.6, height 0.62
1206_[3216] [mm] "Chip Capacitor, Body 3.2x1.6mm, IPC High Density"
  rect 1.1x1.7 smd: 1(-1.35,0) 2(1.35,0)
  silkscreen extent -0.4,-0.75 0.4,0.75, body extent -1.7,-0.9 1.7,0.9, height 1.3
CRYSTAL_HC49UP [mil]
  rect 216.53x78.73 smd: 1(-187,0) 2(187,0)
  silkscreen extent -226,-96 226,96, body extent -295,-89 295,89, height 99
HDR1X10 [mm] "Connector; Header; 10 Position"
  rect 1.5x1.5 hole 0.9: 1(0,0)
  round 1.5 hole 0.9: 2(2.54,0) 3(5.08,0) 4(7.62,0) 5(10.16,0) 6(12.7,0) 7(15.24,0) 8(17.78,0) 9(20.32,0) 10(22.86,0)
  silkscreen extent -1.27,-1.27 24.13,1.27
HEADER_1X4_2.54MM_THD [mm] "Connector; Header; 4 Position"
  rect 1.5x1.5 hole 0.9: 1(-3.81,0)
  round 1.5 hole 0.9: 2(-1.27,0) 3(1.27,0) 4(3.81,0)
  silkscreen extent -5.08,-1.27 5.08,1.27, body extent -5.08,-1.25 4.98,1.25, height 8.2
QFN-32 [mm]
  rect 0.5x0.3 smd: 1(-2.35,1.75) 2(-2.35,1.25) 3(-2.35,0.75) 4(-2.35,0.25) 5(-2.35,-0.25) 6(-2.35,-0.75) 7(-2.35,-1.25) 8(-2.35,-1.75) 17(2.35,-1.75) 18(2.35,-1.25) 19(2.35,-0.75) 20(2.35,-0.25) 21(2.35,0.25) 22(2.35,0.75) 23(2.35,1.25) 24(2.35,1.75)
  rect 0.3x0.5 smd: 9(-1.75,-2.35) 10(-1.25,-2.35) 11(-0.75,-2.35) 12(-0.25,-2.35) 13(0.25,-2.35) 14(0.75,-2.35) 15(1.25,-2.35) 16(1.75,-2.35) 25(1.75,2.35) 26(1.25,2.35) 27(0.75,2.35) 28(0.25,2.35) 29(-0.25,2.35) 30(-0.75,2.35) 31(-1.25,2.35) 32(-1.75,2.35)
  round 0.7 hole 0.35 paste-10 mask-10: GND_PAD(-0.8,-0.6) GND_PAD(-0.8,0.7) GND_PAD(0,0) GND_PAD(0.8,-0.6) GND_PAD(0.8,0.7)
  rect 3.2x3.2 smd: GND_PAD(0,0)
  silkscreen extent -2.5,-2.5 2.5,2.5, body extent -2.5,-2.5 2.5,2.5, height 1.2
R3_RGB_LED_THD [mm]
  round 1.5 hole 0.9: 1(-1.27,0) 3(-3.81,0) 4(3.81,0)
  rect 1.5x1.5 hole 0.9: 2(1.27,0)
  silkscreen extent -0.94,-1.5 0.94,1.5
SOD-123 [mm] "SOD-123; 2 Leads; Body 2.7 x 1.6 mm, (LxW)"
  rect 1.6x0.8 smd: 1(1.7,0) 2(-1.7,0)
  silkscreen extent -1.45,-0.85 1.45,0.85, body extent -1.85,-0.8 1.85,0.8, height 1.27
SOIC8 [mm] "SOIC, 8-Leads, Body 4.9x3.8mm, Pitch 1.27mm, IPC Low Density"
  oval 2.5x0.7 smd: 1(-2.45,1.905) 2(-2.45,0.635) 3(-2.45,-0.635) 4(-2.45,-1.905) 5(2.45,-1.905) 6(2.45,-0.635) 7(2.45,0.635) 8(2.45,1.905)
  silkscreen extent -0.8,-2.5 0.8,2.5, body extent -2,-2.5 2,2.5, height 1.75
SOIC16 [mm] "SOIC, 16-Leads, Body 9.9x3.9mm, Pitch 1.27mm, IPC High Density"
  oval 1.9x0.6 smd: 1(-2.35,4.445) 2(-2.35,3.175) 3(-2.35,1.905) 4(-2.35,0.635) 5(-2.35,-0.635) 6(-2.35,-1.905) 7(-2.35,-3.175) 8(-2.35,-4.445) 9(2.35,-4.445) 10(2.35,-3.175) 11(2.35,-1.905) 12(2.35,-0.635) 13(2.35,0.635) 14(2.35,1.905) 15(2.35,3.175) 16(2.35,4.445)
  silkscreen extent -1,-5 1,5, body extent -2,-5 2,5, height 1.91
SOIC18 [mm] "SOIC, 18-Leads, Body 11.5x7.5mm, Pitch 1.27mm, IPC Medium Density"
  oval 2.3x0.6 smd: 1(-4.55,5.08) 2(-4.55,3.81) 3(-4.55,2.54) 4(-4.55,1.27) 5(-4.55,0) 6(-4.55,-1.27) 7(-4.55,-2.54) 8(-4.55,-3.81) 9(-4.55,-5.08) 10(4.55,-5.08) 11(4.55,-3.81) 12(4.55,-2.54) 13(4.55,-1.27) 14(4.55,0) 15(4.55,1.27) 16(4.55,2.54) 17(4.55,3.81) 18(4.55,5.08)
  silkscreen extent -4.67,-5.9 3,6.05, body extent -3.8,-5.95 3.8,5.95, height 2.65
SOT-23 [mm] "SOT23, 3-Leads, Body 2.9x1.3mm, Pitch 0.95mm, Lead Span 2.5mm, IPC High Density"
  rect 0.9x0.65 smd: 1(-1.038,0.95) 2(-1.038,-0.95)
  rect 1.1x0.65 smd: 3(1.038,0)
  silkscreen extent -0.3,-1.6 0.7,1.6, body extent -1.2,-1.52 1.2,1.52, height 1.22
SOT-223 [mm] "SOT223, 4-Leads, Body 6.5x3.5mm, Pitch 2.3mm, Lead Span 7mm, IPC Medium Density"
  rect 2.4x1 smd: 1(-2.9,2.3) 2(-2.9,0) 3(-2.9,-2.3)
  rect 2.4x3.3 smd: 4(2.9,0)
  silkscreen extent -1.25,-3.35 1.25,3.35, body extent -1.85,-3.35 1.85,3.35, height 1.8
SOT-563 [mm]
  rect 0.3x0.5 smd: 1(-0.5,-0.7) 2(0,-0.7) 3(0.5,-0.7) 4(0.5,0.7) 5(0,0.7) 6(-0.5,0.7)
  silkscreen extent -0.9,-0.61 0.9,0.6, body extent -0.8,-0.79 0.8,0.81, height 0.55
TACTILE_SWITCH_GATERON_PCB [mm] "16x16mm pcb mount version"
  round 2.8 hole 1.55: 1(-3.81,2.54) 2(2.54,5.08)
  round 1.75 hole 1.75 unplated: Hole(-5.08,0) Hole(5.08,0)
  round 4.1 hole 4.1 unplated: Hole(0,0)
  body extent -7.82,-8.16 7.82,8.16, height 14.9
tactile_switch_gateron_pcb [mm] "16x16mm pcb mount version"
  round 2.8 hole 1.55: 1(-3.81,2.54) 2(2.54,5.08)
  round 1.75 hole 1.75 unplated: Hole(-5.08,0) Hole(5.08,0)
  round 4.1 hole 4.1 unplated: Hole(0,0)
  body extent -7.82,-8.16 7.82,8.16, height 14.9
TEST_POINT_THD_D1.8MM [mm] "Test point D=1.6MM"
  round 1.8 hole 0.95 paste-10 mask+0.05: 1(0,0)
TSQFP50P1200X1200X160-64N [mm] "TSQFP, 64-Leads, Body 10,00x10,00mm, Pitch 0,50mm, IPC Medium Density"
  oval 1.4x0.3 smd: 1(-5.7,3.75) 2(-5.7,3.25) 3(-5.7,2.75) 4(-5.7,2.25) 5(-5.7,1.75) 6(-5.7,1.25) 7(-5.7,0.75) 8(-5.7,0.25) 9(-5.7,-0.25) 10(-5.7,-0.75) 11(-5.7,-1.25) 12(-5.7,-1.75) 13(-5.7,-2.25) 14(-5.7,-2.75) 15(-5.7,-3.25) 16(-5.7,-3.75) 33(5.7,-3.75) 34(5.7,-3.25) 35(5.7,-2.75) 36(5.7,-2.25) 37(5.7,-1.75) 38(5.7,-1.25) 39(5.7,-0.75) 40(5.7,-0.25) 41(5.7,0.25) 42(5.7,0.75) 43(5.7,1.25) 44(5.7,1.75) 45(5.7,2.25) 46(5.7,2.75) 47(5.7,3.25) 48(5.7,3.75)
  oval 0.3x1.4 smd: 17(-3.75,-5.7) 18(-3.25,-5.7) 19(-2.75,-5.7) 20(-2.25,-5.7) 21(-1.75,-5.7) 22(-1.25,-5.7) 23(-0.75,-5.7) 24(-0.25,-5.7) 25(0.25,-5.7) 26(0.75,-5.7) 27(1.25,-5.7) 28(1.75,-5.7) 29(2.25,-5.7) 30(2.75,-5.7) 31(3.25,-5.7) 32(3.75,-5.7) 49(3.75,5.7) 50(3.25,5.7) 51(2.75,5.7) 52(2.25,5.7) 53(1.75,5.7) 54(1.25,5.7) 55(0.75,5.7) 56(0.25,5.7) 57(-0.25,5.7) 58(-0.75,5.7) 59(-1.25,5.7) 60(-1.75,5.7) 61(-2.25,5.7) 62(-2.75,5.7) 63(-3.25,5.7) 64(-3.75,5.7)
  silkscreen extent -5.82,-4.6 4.6,4.6, body extent -5,-5 5,5, height 1.6
usb_typeB_mini_smd [mm] "5 pins"
  rect 0.5x2.25 smd: 1(-1.6,2.75) 2(-0.8,2.75) 3(0,2.75) 4(0.8,2.75) 5(1.6,2.75)
  rect 2x2.5 smd: Z1(-4.45,2.75) Z2(4.45,2.75) Z3(4.45,-2.75) Z4(-4.45,-2.75)
  round 0.9 hole 0.9 unplated: ""(-2.2,0.15) ""(2.2,0.15)
  silkscreen extent -4.2,-5.8 4,4.52, body extent -4.8,-5.75 4.8,3.5, height 3.97